# Altium PCB PCB_Pompa.PcbDoc
Units mm, origin at the board's own origin, x right, y up, seen from the top; angles counter-clockwise.
Board outline 60.32 x 86.11 mm, 2 copper layers (Top Layer, Bottom Layer); 36 components, 20 nets, 119 pads, 21 vias.
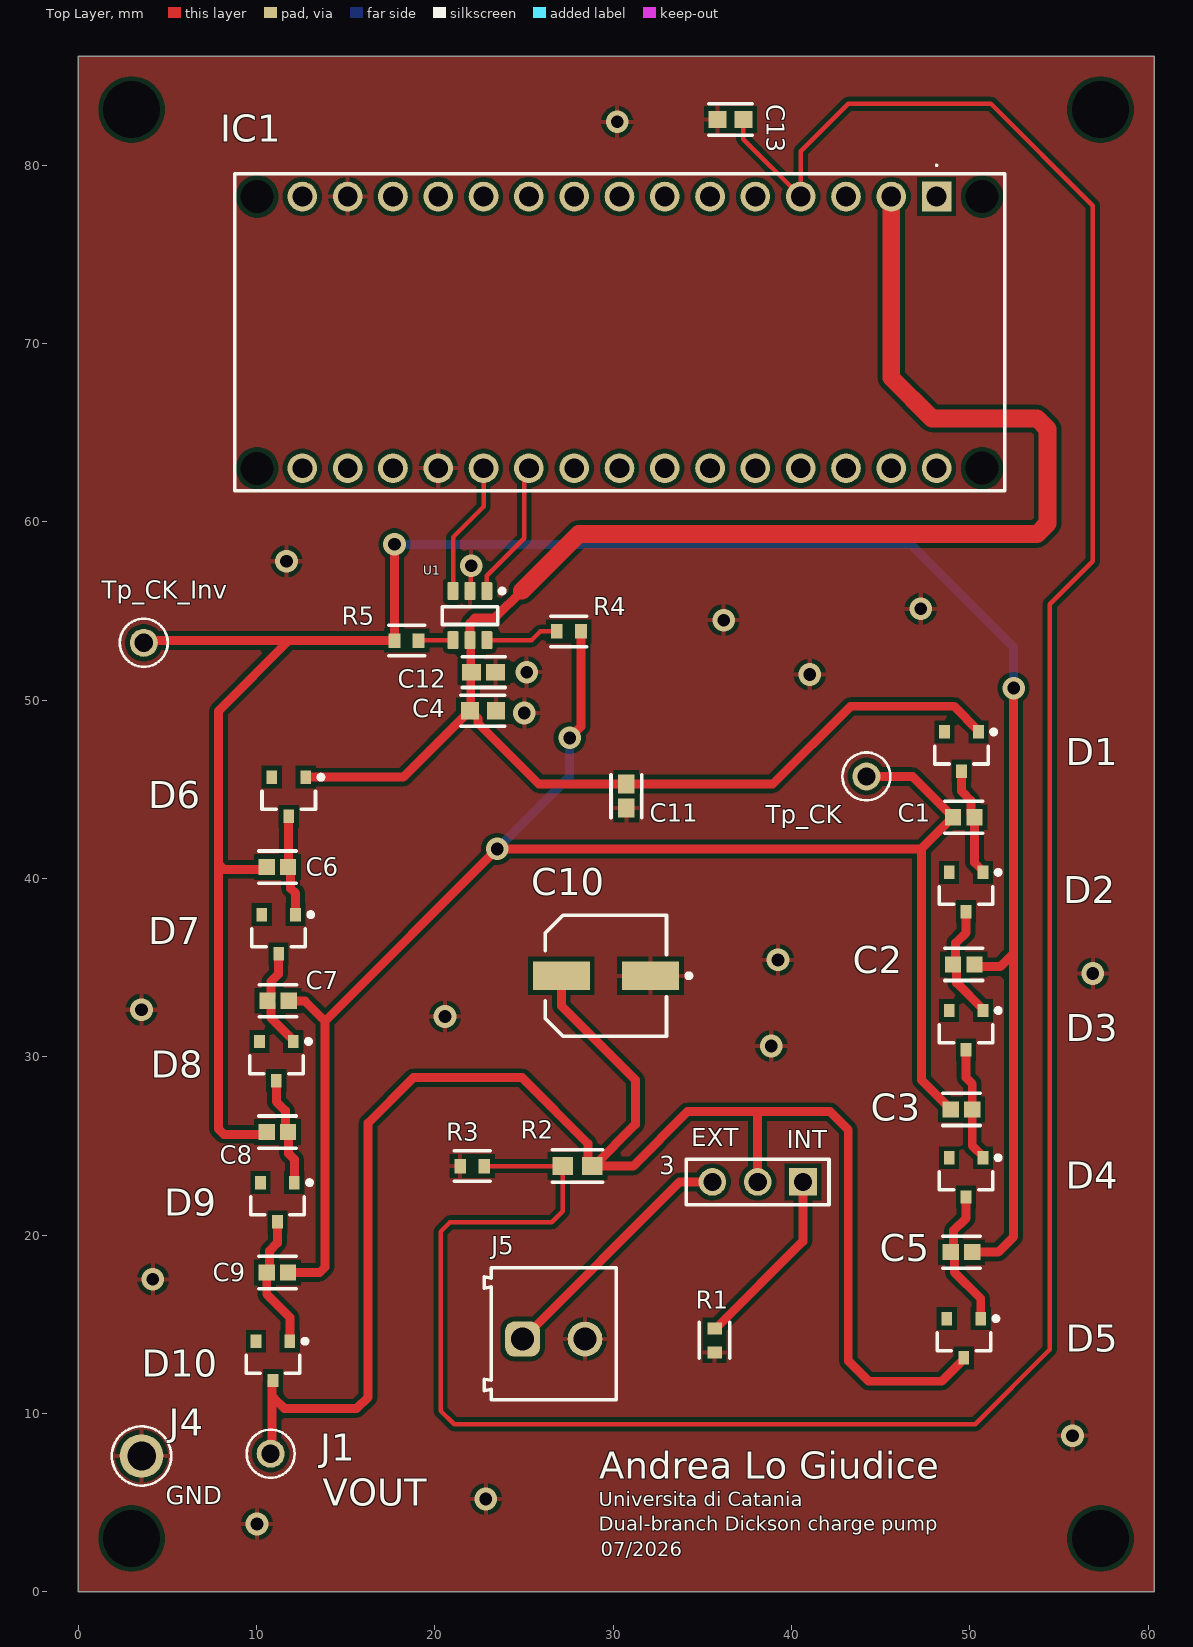
[diagram p0: Top Layer view]
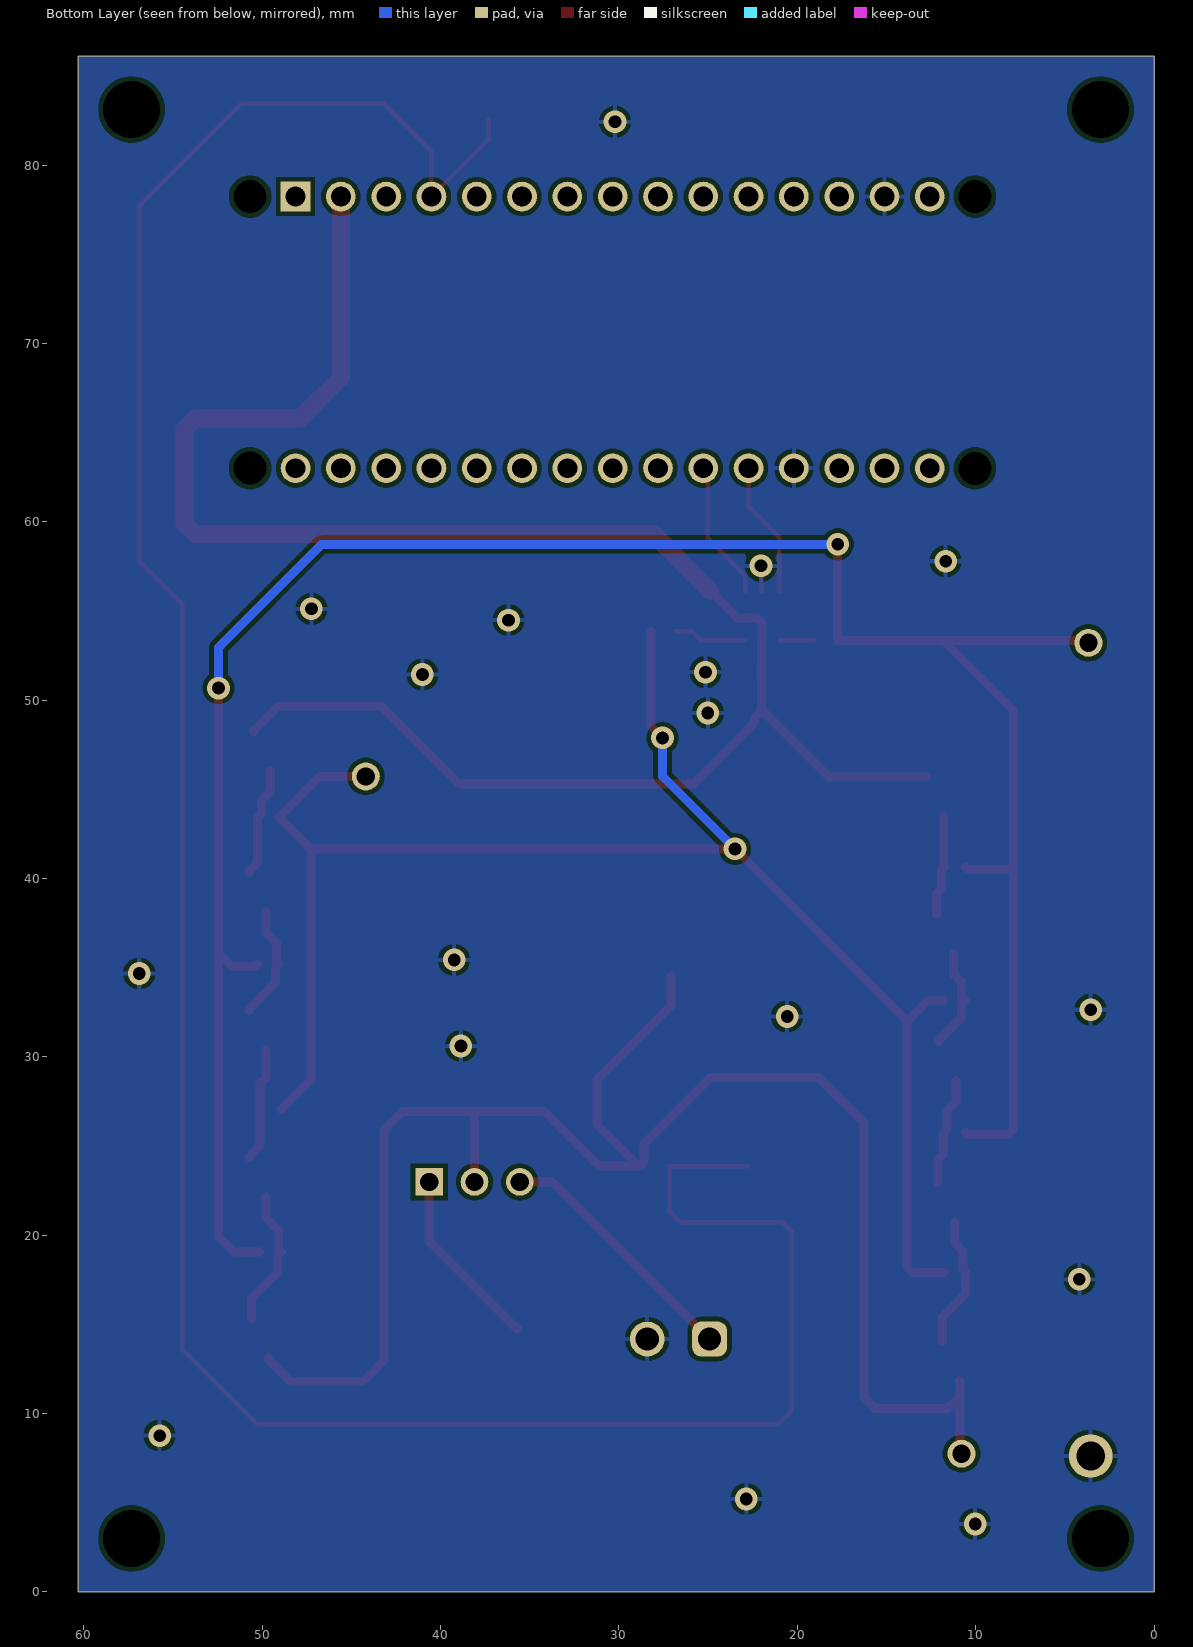
[diagram p1: Bottom Layer view, seen from below]
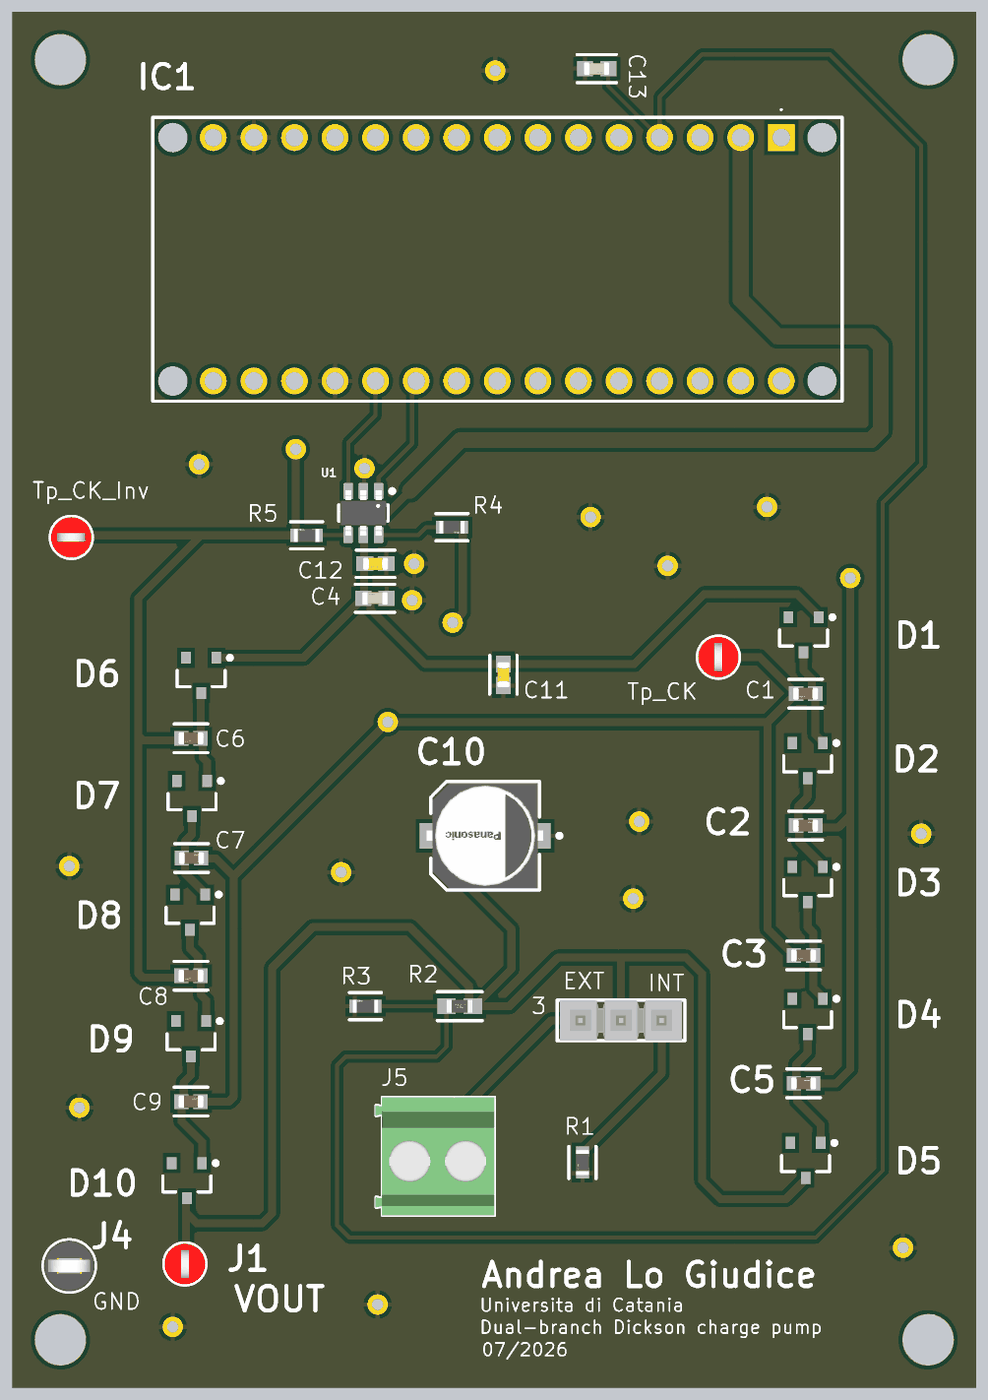
[diagram p2: 3D render of the assembled board from above, using the file's embedded part models]

## Layer stack, top to bottom
Top Solder: solder mask 0.0102, Solder Resist, Dk 3.5
Top Layer: signal copper 0.0356
Dielectric 1: dielectric 0.32, FR-4, Dk 4.8
Bottom Layer: signal copper 0.0356
Bottom Solder: solder mask 0.0102, Solder Resist, Dk 3.5

## Board outline
0,0 0,86.106 60.325,86.106 60.325,0

## Design rules (kind name [scope] priority, off if disabled: settings)
Clearance [All] p1: gap=0.254 ignorepadtopadclearanceinfootprint=FALSE
PolygonConnect [All] p1: connectstyle=Relief reliefconductorwidth=0.254 reliefentries=4 polygonreliefangle="90 Angle" airgapwidth=0.254
RoutingVias [All] p1: holewidth=0.711 width=1.27 viastyle="Through Hole" minholewidth=0.711 minwidth=1.27 maxholewidth=0.711 maxwidth=1.27
SolderMaskExpansion [All] p1: expansion=0 istentingtop=FALSE
Width [All] p1: maxlimit=1 minlimit=0.254 preferedwidth=0.254 minimp=50.000000 maximp=50.000000 favimp=50.000000
30 further rules are at their usual default settings.

## Components (designator, comment, footprint, x,y, rotation, side; value= is the part's Value field where it differs from the comment)
3 "TSW-103-07-T-S" SMTC-TSW-103-07-X-S 40.64,22.987 r180 top
C1 "GRM188Z71E225ME43D" FP-GRM188-0_2-IPC_C 49.657,43.434 r180 top
C2 "GRM188Z71E225ME43D" FP-GRM188-0_2-IPC_C 49.657,35.179 r0 top
C3 "GRM188Z71E225ME43D" FP-GRM188-0_2-IPC_C 49.53,27.051 r180 top
C4 "0.1uF" FP-C0603C-CF-IPC_B 22.697,49.403 r0 top value="0.10 μF"
C5 "GRM188Z71E225ME43D" FP-GRM188-0_2-IPC_C 49.53,19.05 r0 top
C6 "GRM188Z71E225ME43D" FP-GRM188-0_2-IPC_C 11.176,40.64 r180 top
C7 "GRM188Z71E225ME43D" FP-GRM188-0_2-IPC_C 11.21,33.147 r0 top
C8 "GRM188Z71E225ME43D" FP-GRM188-0_2-IPC_C 11.176,25.781 r180 top
C9 "GRM188Z71E225ME43D" FP-GRM188-0_2-IPC_C 11.176,17.907 r0 top
C10 "EEHZC1E101XP" FP-EEH-D8-MFG 29.591,34.544 r180 top
C11 "1uF" FP-CC0603-DA-IPC_B 30.734,44.619 r270 top value="1 uF"
C12 "4.7uF" FP-CC0603-DA-IPC_B 22.733,51.562 r0 top value="4.7 uF"
C13 "0.1uF" FP-C0603C-CF-IPC_B 36.576,82.55 r180 top value="0.10 μF"
D1 "BAT54" INF-SOT23_L 49.53,47.117 r270 top
D2 "BAT54" INF-SOT23_L 49.784,39.243 r270 top
D3 "BAT54" INF-SOT23_L 49.784,31.496 r270 top
D4 "BAT54" INF-SOT23_L 49.784,23.241 r270 top
D5 "BAT54" INF-SOT23_L 49.657,14.224 r270 top
D6 "BAT54" INF-SOT23_L 11.811,44.577 r270 top
D7 "BAT54" INF-SOT23_L 11.242,36.873 r270 top
D8 "BAT54" INF-SOT23_L 11.115,29.761 r270 top
D9 "BAT54" INF-SOT23_L 11.176,21.844 r270 top
D10 "BAT54" INF-SOT23_L 10.922,12.954 r270 top
IC1 "ABX00027" ABX00027 48.133,78.232 r180 top
J1 "TP_out" FP-5000-MFG 10.795,7.747 r90 top
J4 "5006" FP-5006-MFG 3.556,7.62 r0 top
J5 "691214110002" 691214110002 26.67,14.478 r0 top
R1 "12K" FP-AT0603-IPC_C 35.687,14.097 r270 top
R2 "100K" FP-CRGP0603-IPC_A 28.002,23.876 r180 top value=100KΩ
R3 "15K" FP-AC0603-IPC_C 22.098,23.876 r180 top
R4 "47R" FP-AC0603-IPC_C 27.517,53.848 r0 top
R5 "47R" FP-AC0603-IPC_C 18.415,53.34 r180 top
Tp_CK "5000" FP-5000-MFG 44.196,45.72 r90 top (schematic designator J2)
Tp_CK_Inv "5000" FP-5000-MFG 3.683,53.213 r0 top (schematic designator J3)
U1 "SN74LVC2G34DBVR" DBV0006A_N 21.971,54.737 r270 top

## Footprints (in the part's own frame and the unit in brackets; to place one, negate y for a bottom-side part, rotate by r counter-clockwise, add the part's x,y. Pads: shape width x height; smd on the part's side, far side on the other; paste and mask are expansions set on the pad)
691214110002 [mm] "3.50 mm Horizontal Entry Modular, 2p"
  rrect50% 1.95x1.95 hole 1.3: 1(-1.75,-0.3)
  round 1.95 hole 1.3: 2(1.75,-0.3)
  silkscreen extent -3.9,-3.7 3.5,3.7, body extent -3.95,-3.7 3.5,3.7, height 8.55
ABX00027 [mm]
  rect 1.665x1.665 hole 1.11: 1(0,0)
  round 1.665 hole 1.11: 2(2.54,0) 3(5.08,0) 4(7.62,0) 5(10.16,0) 6(12.7,0) 7(15.24,0) 8(17.78,0) 9(20.32,0) 10(22.86,0) 11(25.4,0) 12(27.94,0) 13(30.48,0) 14(33.02,0) 15(35.56,0) 16(35.56,15.23) 17(33.02,15.23) 18(30.48,15.23) 19(27.94,15.23) 20(25.4,15.23) 21(22.86,15.23) 22(20.32,15.23) 23(17.78,15.23) 24(15.24,15.23) 25(12.7,15.23) 26(10.16,15.23) 27(7.62,15.23) 28(5.08,15.23) 29(2.54,15.23) 30(0,15.23)
  round 0.925 hole 1.85 unplated: MH1(-2.55,0) MH2(38.09,0) MH3(38.09,15.235) MH4(-2.55,15.23)
  silkscreen extent -3.81,-1.8 39.35,16.5
DBV0006A_N [mm] "SOT23, 6-Leads, Body 3.05x1.75mm, Pitch 0.95mm, IPC Medium Density"
  rrect17% 1x0.6 smd: 1(-1.375,0.95) 2(-1.375,0) 3(-1.375,-0.95) 4(1.375,-0.95) 5(1.375,0) 6(1.375,0.95)
  silkscreen extent -1.5,-1.55 0.5,1.93, body extent -1.42,-1.46 1.42,1.46, height 1.11
FP-5000-MFG [mm]
  round 1.57 hole 1.02 paste-2539.97 mask+0: 1(0,0)
  silkscreen extent -1.34,-1.35 1.34,1.35, body extent -1.45,-1.45 1.45,1.45, height 0.25
FP-5006-MFG [mm]
  round 2.45 hole 1.6 paste-2539.97 mask+0: 1(0,0)
  silkscreen extent -1.66,-1.66 1.67,1.66, body extent -1.77,-1.77 1.77,1.77, height 0.25
FP-AC0603-IPC_C [mm]
  rect 0.659x0.812 smd paste+0 mask+0: 1(-0.677,0) 2(0.677,0)
  silkscreen extent -1.01,-0.85 1.01,0.85, body extent -1.11,-0.55 1.11,0.55, height 0.25
FP-AT0603-IPC_C [mm]
  rect 0.659x0.812 smd paste+0 mask+0: 1(-0.677,0) 2(0.677,0)
  silkscreen extent -1.01,-0.85 1.01,0.85, body extent -1.11,-0.55 1.11,0.55, height 0.25
FP-C0603C-CF-IPC_B [mm]
  rect 1.007x0.958 smd paste+0 mask+0: 1(-0.726,0) 2(0.726,0)
  silkscreen extent -1.23,-0.88 1.23,0.88, body extent -1.48,-0.73 1.48,0.73, height 0.25
FP-CC0603-DA-IPC_B [mm]
  rect 1.058x0.912 smd paste+0 mask+0: 1(-0.677,0) 2(0.677,0)
  silkscreen extent -1.21,-0.86 1.21,0.86, body extent -1.46,-0.71 1.46,0.71, height 0.25
FP-CRGP0603-IPC_A [mm]
  rect 1.158x1.012 smd paste+0 mask+0: 1(-0.827,0) 2(0.827,0)
  silkscreen extent -1.41,-0.91 1.41,0.91, body extent -1.91,-1.01 1.91,1.01, height 0.25
FP-EEH-D8-MFG [mm]
  rect 3.2x1.6 smd paste+0 mask+0: 1(-2.5,0) 2(2.5,0)
  silkscreen extent -4.77,-3.4 3.4,3.4, body extent -4.35,-3.65 4.35,3.65, height 0.25
FP-GRM188-0_2-IPC_C [mm]
  rect 0.905x0.906 smd paste+0 mask+0: 1(-0.601,0) 2(0.601,0)
  silkscreen extent -1.05,-0.9 1.05,0.9, body extent -1.15,-0.6 1.15,0.6, height 0.25
INF-SOT23_L [mm] "SOT23, 3-Leads, Body 2.9x1.3 mm, Pitch 0.95 mm, IPC High Density"
  rect 0.75x0.6 smd: 1(-1.1,0.95) 2(-1.1,-0.95) 3(1.1,0)
  silkscreen extent -1.22,-1.5 0.7,1.93, body extent -0.7,-1.5 0.7,1.5, height 1.1
SMTC-TSW-103-07-X-S [mm] ".025 SQ Post Terminal Strip Assembly, 1x3 Pins, Vertical, 2.54mm Pitch, Male"
  rect 1.55x1.55 hole 1.02: 1(0,0)
  round 1.55 hole 1.02: 2(2.54,0) 3(5.08,0)
  silkscreen extent -1.46,-1.27 6.54,1.27, body extent -1.27,-1.27 6.35,1.27, height 8.38

## Part data
3: library part CMP-1024-00332-1, "0.025\" SQ Post Header, Through-hole, Vertical, -55 to 105 degC, 2.54 mm Pitch, 3-Pin, Male, RoHS", Manufacturer=Samtec, Temperature Range="-55 to 105 degC", ComponentLink1Description="Manufacturer URL", ComponentLink1URL=http://www.samtec.com, ComponentLink2Description=Datasheet, ComponentLink2URL=http://www.samtec.com/documents/webfiles/pdf/TSW_TH.PDF, ComponentLink3Description="Package Specification", ComponentLink3URL=http://www.samtec.com/documents/webfiles/cpdf/TSW-XXX-XX-XXX-X-XX-XXX-MKT.pdf, DatasheetVersion=F-214, Mounting Technology=Through-hole, Orientation=Vertical, PackageDescription=".025[0.64] SQ. Post Terminal Strip Assembly", PackageReference=TSW-103-07-X-S, PackageVersion="DM, 8/1988", PartNumber=TSW-103-07-T-S, Pitch="2.54 mm", RoHS=True
C1 C2 C3 C5 C6 C7 C8 C9: library part CMP-06035-003326-1, "Chip Multilayer Ceramic Capacitors for General Purpose, 0603, 2.2uF, X7R, 15%, 20%, 25V"
C4 C13: library part CMP-2006-03067-2, "CAP CER 0.1UF 16V X7R 0603", Capacitance="0.10 μF", Manufacturer=KEMET, Manufacturer Part Number=C0603C104M4RACTU, Package=C0603C-CF, Temperature="-55°C to +125°C", Temperature Characteristic=X7R, Temperature Coefficient=30ppm/°C, Temperature Range High=+125°C, Temperature Range Low=-55°C, Tolerance=0.2, Voltage Rating="16 V", Automotive=Yes, Automotive Grade="Grade 1", Category=Cap, ComponentLink2Description=Datasheet, ComponentLink2URL=https://api.kemet.com/component-edge/download/datasheet/C0603C100J5GACAUTO.pdf, Device Class L1="Passive Components", Device Class L2=Capacitors, Device Class L3="Ceramic Capacitors", Digikey Description="CAP CER 0.1UF 16V X7R 0603", Height=0.87mm, Lead Free=Yes, Material=Ceramic, Mouser Description="Multilayer Ceramic Capacitors MLCC - SMD/SMT 16volts 0.1uF X7R 20%", Octopart=https://octopart.com/c0603c104m4ractu-kemet-134275, RoHS=TRUE
C10: library part CMP-05428-000858-1, "Conductive Polymer Hybrid Aluminum Electrolytic Capacitors 100uF ±20% 25V RADIAL SMT 6.3x7.7mm", Capacitance=100uF, Case/Package=Radial, ESR (Equivalent Series Resistance)=30mR, Leakage Current=3uA, Max Operating Temperature=125°C, Min Operating Temperature=-55°C, Package Quantity=900, Ratings=AEC-Q200, Ripple Current=1.4A, Tolerance=20%, Voltage=25V, Construction=Cylindrical, Diameter=6.3mm, Height=7.7mm, Height - Seated (Max)=0.315inch, Lead Diameter=0.65mm, Lead Free="Lead Free", Lead Pitch=1.8mm, Length=7.7mm, Life (Hours)=4000Hour, Material=Polymer, Mount="Surface Mount", Number of Pins=8, Packaging="Tape and Reel", Radiation Hardening=No, REACH SVHC="No SVHC", Ripple Current (AC)=1.4A, RoHS Compliant=Yes, Series=ZC, Technology=HYBRID, Termination=SMD/SMT, Voltage Rating=25V, Voltage Rating (DC)=25V
C11: library part CMP-03422-000101-1, "CC0603 1 uF X7R 10.00% 25 V", Capacitance="1 uF", Manufacturer=YAGEO, Manufacturer Part Number=CC0603KPX7R8BB105, Package=CC0603-DA, Temperature="-55°C to +125°C", Temperature Characteristic=X7R, Temperature Coefficient=15%, Temperature Range High=+125°C, Temperature Range Low=-55°C, Tolerance=0.1, Voltage="25 V", Automotive=No, Category=Cap, ComponentLink2Description=Datasheet, ComponentLink2URL=http://www.yageo.com/documents/recent/UPY-GPHC_X7R_6.3V-to-50V_18.pdf, Device Class L1="Passive Components", Device Class L2=Capacitors, Device Class L3="Ceramic Capacitors", Footprint Url=http://www.yageo.com/exep/pages/download/literatures/UPY-C_GEN_24.pdf, Height=0.9mm, Lead Free=Yes, Material=Ceramic, Octopart=https://octopart.com/cc0603kpx7r8bb105-yageo-95714672, RoHS=TRUE, Voltage Rating="25 V"
C12: library part CMP-03422-001204-1, "CAP CER 4.7UF 25V X5R 0603", Capacitance="4.7 uF", Manufacturer=YAGEO, Manufacturer Part Number=CC0603MRX5R8BB475, Package=CC0603-DA, Temperature="-55°C to +125°C", Temperature Characteristic=X5R, Temperature Coefficient=15%, Temperature Range High=+125°C, Temperature Range Low=-55°C, Tolerance=0.2, Voltage="25 V", Automotive=No, Category=Cap, ComponentLink2Description=Datasheet, ComponentLink2URL=http://www.yageo.com/documents/recent/UPY-GPHC_X7R_6.3V-to-50V_18.pdf, Device Class L1="Passive Components", Device Class L2=Capacitors, Device Class L3="Ceramic Capacitors", Digikey Description="CAP CER 4.7UF 25V X5R 0603", Footprint Url=http://www.yageo.com/exep/pages/download/literatures/UPY-C_GEN_24.pdf, Height=0.9mm, Lead Free=Yes, Material=Ceramic, Octopart=https://octopart.com/cc0603mrx5r8bb475-yageo-81932637, RoHS=TRUE, Voltage Rating="25 V"
D1 D2 D3 D4 D5 D6 D7 D8 D9 D10: library part CMP-1182-00010-1, "Silicon Schottky Diode, SOT23, Reel, Green", Manufacturer=Infineon, ComponentLink1Description="Manufacturer URL", ComponentLink1URL=http://www.infineon.com/, ComponentLink2Description=Datasheet, ComponentLink2URL=http://www.infineon.com/dgdl/bat54series.pdf?folderId=db3a30431400ef68011425f1ca2505e3&fileId=db3a304314dca3890115190b74210ea6, ComponentLink3Description="Package Specification", ComponentLink3URL=http://www.infineon.com/dgdl/SOT23-Package_Overview.pdf?folderId=db3a30431936bc4b0119532290053c66&fileId=db3a30431936bc4b0119533468123c85, Configuration=Single, CT (max)="10Â pF", Green=TRUE, IF (max)="200Â mA", Mounting Technology="Surface Mount", PackageDescription="3-Pin Small Outline Transistor Package, 1.3 x 2.9 mm Body, 0.95 mm Pitch", PackageReference=SOT23, PackageVersion=Apr-08, Packing=Reel, PartNumber=BAT54, VF (max)="800Â mV", VR (max)="30Â V"
IC1: "Integrated Circuit", Manufacturer_Name=Arduino, Mouser Part Number=782-ABX00027, Arrow Part Number=ABX00027, Arrow Price/Stock=https://www.arrow.com/en/products/abx00027/arduino-corporation.html?utm_currency=USD&region=nac, Datasheet Link=https://docs.arduino.cc/static/41e9116cd2cb96a5d1375d64250b334c/ABX00027-datasheet.pdf, Manufacturer_Part_Number=ABX00027, Mouser Price/Stock=https://www.mouser.co.uk/ProductDetail/Arduino/ABX00027?qs=PzGy0jfpSMvleC8D9q4oLA%3D%3D
J1 Tp_CK Tp_CK_Inv: library part CMP-19636-000027-1, "PC TEST POINT MINIATURE RED", Color=Red, Flammability Rating="UL94 V-0", Package Quantity=100, Body Material=Bronze, Contact Material=Bronze, Contact Plating=Tin, Height=0.3inch, Hole Diameter=1.6mm, Housing Color=Red, Inside Diameter=1.27mm, Insulation=Insulated, Lead Free="Lead Free", Length=7.62mm, Material=Nylon, Mount=PCB, Number of Contacts=1, Number of Ports=1, Orientation=Straight, Outside Diameter=2.54mm, Packaging=Bulk, Plating=Silver, REACH SVHC="No SVHC", RoHS Compliant=Yes, Series=THM
J4: library part CMP-19636-000022-1, "PC TEST POINT COMPACT BLACK", Color=Black, Flammability Rating="UL94 V-0", Package Quantity=100, Body Material=Bronze, Contact Material=Bronze, Contact Plating=Tin, Height=0.35inch, Hole Diameter=1.6mm, Housing Color=Black, Inside Diameter=1.78mm, Insulation Material=Nylon, Lead Free="Lead Free", Length=8.89mm, Material=Nylon, Mount=PCB, Number of Ports=1, Orientation=Straight, Outside Diameter=3.18mm, Packaging=Bulk, Plating=Silver, REACH SVHC="No SVHC", RoHS Compliant=Yes, Series=THM
J5: library part CMP-1502-02464-3, "2141 Series 3.5MM Pitch Straight, Pcb Terminal Block, Through Hole, 2 Way", Color="Blue, Green", Current=10A, Max Operating Temperature=105°C, Min Operating Temperature=-40°C, Voltage=300V, Contact Material=Tin, Contact Plating="Brass, Tin", Current Rating=10A, Height=8.7mm, Housing Material=Nylon, Lead Pitch=3.5mm, Length=7.4mm, Mount="Through Hole", Number of Contacts=2, Number of Levels=1, Number of Pins=2, Number of Positions Per Level=2, Number of Rows=1, Packaging=Box, Pitch=3.5052mm, Plating="Brass, Steel", RoHS=Compliant, Stripping Length=-6mm, Termination=Screw, Voltage Rating=300V, Width=7.9mm, Wire Gauge (Max)=24AWG, Wire Gauge (Min)=16AWG, Wire/Cable Gauge=24AWG
R1: library part CMP-03412-015386-2, "Thin Film Chip Resistors Automotive Grade 12kΩ 0.5% 50ppm/°C 0603", Case/Package=0603, Max Operating Temperature=155°C, Max Power Dissipation=100mW, Min Operating Temperature=-55°C, Ratings=AEC-Q200, Resistance=12kR, Resistor Type="Thin Film", Temperature Coefficient=50ppm/°C, Tolerance=0.5%, Features="Moisture Resistant", Height=0.022inch, Length=0.063inch, Number of Terminations=2, Packaging="Tape and Reel", RoHS Compliant=Yes, Series=AT, Width=0.032inch
R2: library part CMP-03211-000885-1, "CRGP 0603 100K 1%", Ambient Temperature Range High=+70°C, Manufacturer=TE, Manufacturer Part Number=CRGP0603F100K, Package=CRGP0603, Power Rating=0.25W, Resistance=100KΩ, Temperature="-55°C to +155°C", Temperature Coefficient=±100ppm/°C, Temperature Range High=+155°C, Temperature Range Low=-55°C, Tolerance=0.01, Voltage Rating=50V, Automotive=No, Category=Res, ComponentLink2Description=Datasheet, ComponentLink2URL=https://www.te.com/commerce/DocumentDelivery/DDEController?Action=srchrtrv&DocNm=9-1773463-9&DocType=DS&DocLang=English, Composition="Thick Film", Device Class L1="Passive Components", Device Class L2=Resistors, Device Class L3="Chip SMD Resistors", Digikey Description="CRGP 0603 100K 1%", Height=0.55mm, Ipc Land Pattern Name=RESC16080X45, Lead Free=Yes, Octopart=https://octopart.com/crgp0603f100k-te+connectivity-91018719, RoHS=TRUE, Series=CRGP
R3: library part CMP-03412-044984-1, "RES 15kΩ 1.00% 0.2W 0603"
R4 R5: library part CMP-03412-038070-1, "RES 47Ω 5.00% 0.1W 0603"
U1: library part CMP-0859-00223-3, "Dual Buffer Gate, DBV0006A, LARGE T&R", F @ Nom Voltage(Max)(Mhz)=150, Generic Part Number=SN74LVC2G34, ICC @ Nom Voltage(Max)(mA)=0.01, Manufacturer="Texas Instruments", Operating Temperature Range(C)="-40 to 125,-40 to 85", Rating=Catalog, tpd @ Nom Voltage(Max)(ns)=8.6,4.4,4.1,3.2, Voltage(Nom)(V)=1.8,2.5,3.3,5, 3-State Output=No, Bits(#)=2, DatasheetVersion=SCES359I, Input Type=CMOS/TTL, Logic=True, Output Drive (IOL/IOH)(Max)(mA)=32/-32, Output Type=CMOS, PackageReference=DBV0006A, Schmitt Trigger=No, Sub-Family="Non-Inverting Buffer/Driver", Technology Family=LVC, VCC(Max)(V)=5.5, VCC(Min)(V)=1.65

## Free pads (board coordinates)
  round 0 hole 3.2: 1(3,3) 1(3,83.106) 1(57.325,3) 1(57.325,83.106)

## Via types
v1: diameter 1.27, hole 0.711, Top Layer to Bottom Layer, 21 vias

## Nets (pads, with @x,y where several pads share a name; then routed paths per layer and width w, separated by ;. In a path a pad name is that pad's centre, name@x,y a point inside that pad or via, vN(x,y) a via of type N, cw(c..) or ccw(c..) an arc to the next point about the centre after c; other vN are vias at no path point)
3.3: C4.1 C11.1 C12.1 D1.1 D6.1 IC1.2 U1.5 | length 108.6
  Top Layer w0.5: D6.1 18.221,45.677 21.947,49.403 C4.1 22.014,49.446 22.014,51.519 C12.1 22.014,51.605 22.014,53.319 U1.5 21.971,54.317 22.264,54.61 23.368,54.61 24.892,56.134 ; C4.1@21.995,49.403 22.415,48.983 22.415,48.715 25.835,45.296 C11.1 38.946,45.296 43.307,49.657 49.115,49.657 50.48,48.292 D1.1
  Top Layer w1: 24.892,56.134 28.067,59.309 53.77,59.309 54.356,59.895 54.356,65.2 53.77,65.786 47.879,65.786 45.593,68.072 IC1.2
A0: C13.1 IC1.4 R2.2 R3.1 | length 153.7
  Top Layer w0.254: R3.1 R2.2 27.175,21.333 26.565,20.723 20.85,20.723 20.32,20.193 20.32,10.16 21.082,9.398 50.292,9.398 54.483,13.589 54.483,55.372 56.896,57.785 56.896,77.724 51.181,83.439 43.18,83.439 40.513,80.772 IC1.4 37.302,81.443 C13.1
CK: C1.2 C3.2 C7.2 C9.2 R4.2 Tp_CK.1 | length 93.7
  Top Layer w0.5: C9.2 13.55,17.907 13.843,18.2 13.843,32.004 ; C7.2 11.832,33.126 12.721,33.126 13.843,32.004 ; v1(27.559,47.879) 28.194,48.514 R4.2 ; Tp_CK.1 46.771,45.72 C1.2 C1.2@48.854,43.231 ; C1.2@48.853,43.231 47.278,41.656 ; C3.2 47.278,28.703 47.278,41.656 ; 13.843,32.004 v1(23.495,41.656) 47.278,41.656
  Bottom Layer w0.5: v1(23.495,41.656) 27.559,45.72 v1(27.559,47.879)
CK_INV: C2.2 C5.2 C6.2 C8.2 R5.2 Tp_CK_Inv.1 | length 129.7
  Top Layer w0.5: Tp_CK_Inv.1 3.81,53.34 11.811,53.34 ; C8.2 10.448,25.654 8.167,25.654 7.874,25.947 7.874,40.806 ; C6.2 10.448,40.513 8.167,40.513 7.874,40.806 ; v1(17.738,58.734) R5.2 11.811,53.34 ; C5.2 51.578,19.05 52.451,19.923 52.451,35.814 ; C2.2 50.385,35.052 51.689,35.052 52.451,35.814 ; v1(52.451,50.673) 52.451,35.814 ; 7.874,40.806 7.874,49.403 11.811,53.34
  Bottom Layer w0.5: v1(17.738,58.734) 46.676,58.734 52.451,52.959 v1(52.451,50.673)
GND: C4.2 C10.1 C11.2 C12.2 C13.2 IC1.14 IC1.19 J4.1 J5.2 R1.2 R3.2 U1.2 | length 1.4
  Top Layer w0.254: U1.2 22.004,56.145 22.004,57.498 v1(22.037,57.531)
  other v1: 10.033,3.81 22.86,5.207 55.753,8.763 4.191,17.526 38.862,30.607 20.574,32.258 3.556,32.639 56.896,34.671 39.243,35.433 25.019,49.276 41.021,51.435 25.146,51.562 36.195,54.483 47.244,55.118 11.684,57.785 30.226,82.423
Net3_1: 3.1 R1.1 | length 10.3
  Top Layer w0.5: R1.1 35.764,14.774 40.64,19.65 3.1
Net3_2: 3.2 C10.2 D5.3 D10.3 J1.1 R2.1 | length 95.5
  Top Layer w0.5: J1.1 10.872,7.824 10.872,11.804 D10.3 ; 10.972,10.872 11.557,10.287 15.621,10.287 16.256,10.922 16.256,26.289 18.796,28.829 24.892,28.829 28.589,25.132 28.589,24.132 R2.1@28.845,23.876 ; C10.2 27.091,32.853 31.242,28.702 31.242,26.216 R2.1@28.902,23.876 ; R2.1 R2.1@28.902,23.876 ; 3.2 38.1,26.758 37.954,26.905 ; D5.3 49.657,13.049 48.419,11.811 44.323,11.811 43.18,12.954 43.18,25.908 42.164,26.924 37.973,26.924 37.954,26.905 ; R2.1@28.902,23.876 31.115,23.876 34.163,26.924 37.934,26.924 37.954,26.905
Net3_3: 3.3 J5.1 | length 14.3
  Top Layer w0.5: J5.1 33.729,22.987 3.3
NetC1_1: C1.1 D1.3 D2.1 | length 6.2
  Top Layer w0.5: D1.3 49.53,44.892 50.055,44.367 50.055,43.637 C1.1 50.258,40.894 50.734,40.418 D2.1
NetC2_1: C2.1 D2.3 D3.1 | length 6.5
  Top Layer w0.5: D2.3 49.784,36.963 49.204,36.382 49.204,35.326 C2.1 49.259,34.976 49.259,34.146 50.734,32.671 D3.1
NetC3_1: C3.1 D3.3 D4.1 | length 6.4
  Top Layer w0.5: D3.3 49.784,28.835 50.131,28.488 C3.1 50.131,25.019 50.734,24.416 D4.1
NetC5_1: C5.1 D4.3 D5.1 | length 7.9
  Top Layer w0.5: D4.3 49.784,20.961 49.077,20.253 49.077,19.197 C5.1 49.132,18.847 49.132,17.924 50.607,16.449 D5.1
NetC6_1: C6.1 D6.3 D7.1 | length 5.7
  Top Layer w0.5: D6.3 11.794,43.46 11.794,40.657 C6.1 11.916,40.5 11.916,39.437 12.192,39.161 D7.1
NetC7_1: C7.1 D7.3 D8.1 | length 5.8
  Top Layer w0.5: D7.3 11.242,34.648 10.812,34.218 10.812,33.35 C7.1 10.812,32.944 10.812,32.189 12.065,30.936 D8.1
NetC8_1: C8.1 D8.3 D9.1 | length 6.1
  Top Layer w0.5: D8.3 11.115,27.49 11.62,26.984 11.62,25.937 C8.1 11.798,25.759 11.798,24.578 12.126,24.25 D9.1
NetC9_1: C9.1 D9.3 D10.1 | length 7.5
  Top Layer w0.5: D9.3 11.176,19.564 10.723,19.11 10.723,18.054 C9.1 10.575,16.691 11.872,15.394 D10.1
NetR4_1: R4.1 U1.6 | length 4.1
  Top Layer w0.254: U1.6 25.422,53.362 25.908,53.848 R4.1
NetR5_1: R5.1 U1.4 | length 1.9
  Top Layer w0.254: R5.1 19.114,53.362 U1.4
SIG_D2: IC1.21 U1.1 | length 7.9
  Top Layer w0.254: U1.1 22.921,56.978 25.019,59.076 25.019,62.748 IC1.21
SIG_D3: IC1.20 U1.3 | length 7.6
  Top Layer w0.254: U1.3 21.021,59.121 22.733,60.833 IC1.20
pads on no net: D1.2 D2.2 D3.2 D4.2 D5.2 D6.2 D7.2 D8.2 D9.2 D10.2 IC1.1 IC1.3 IC1.5 IC1.6 IC1.7 IC1.8 IC1.9 IC1.10 IC1.11 IC1.12 IC1.13 IC1.15 IC1.16 IC1.17 IC1.18 IC1.22 IC1.23 IC1.24 IC1.25 IC1.26 IC1.27 IC1.28 IC1.29 IC1.30 IC1.MH1 IC1.MH2 IC1.MH3 IC1.MH4

## Polygon pours and split planes (outlines as drawn)
GND on Mechanical 1 (solid): 60.364,0.033 60.331,0 0,0
GND on Top Layer "GND_L01_P002" (solid, pour order 2): 0,86.106 60.325,86.106 60.325,0 0,0
GND on Bottom Layer "GND_L02_P003" (solid, pour order 3): 0,86.106 60.325,86.106 60.325,0 0,0

## Silkscreen, mask and mechanical layers (free items; w line width, h text height)
Top Overlay:
  text "EXT" at 34.39,24.992 h1
  text "INT" at 39.724,24.865 h1
  text "Andrea Lo Giudice" at 29.21,6.35 h1.52
  text "GND" at 4.926,4.926 h1
  text "VOUT" at 13.716,4.826 h1.52
  text "Universita di Catania" at 29.183,4.799 h0.8
  text "Dual-branch Dickson charge pump" at 29.183,3.415 h0.8
  text "07/2026" at 29.31,2.005 h0.8
Mechanical 1:
  the board outline again, w0.254